# EAGLE board 64ch_hirose_flex (EAGLE 7.3.0)
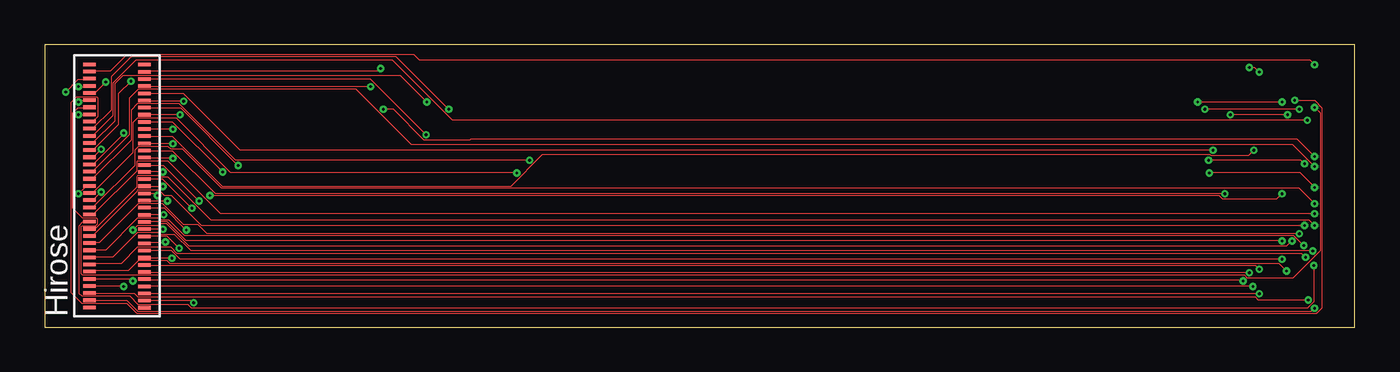
[diagram p0: board, top side]
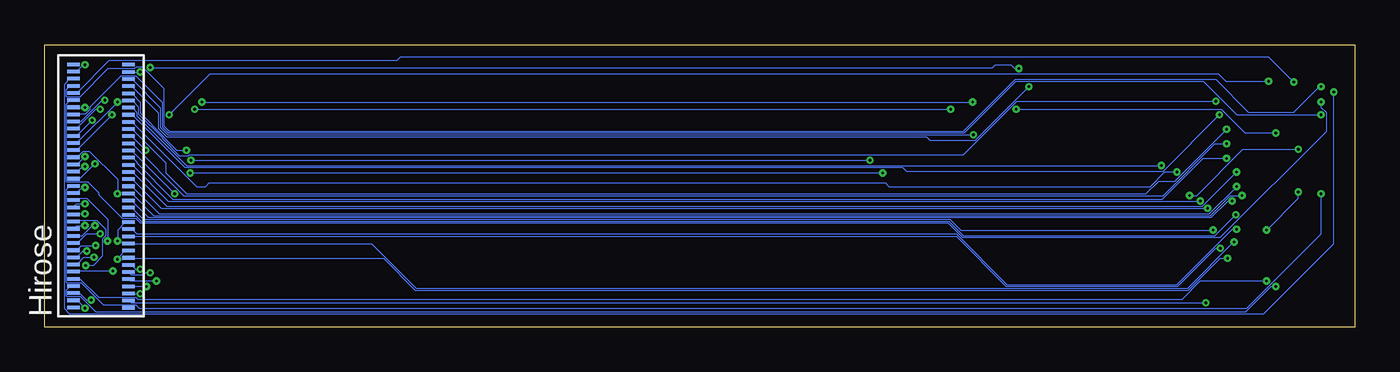
[diagram p1: board, bottom side, seen from below]

Size 73.33 x 15.8 mm. Coordinates in mm from the lower left corner, seen from the top.
Outline: 19.7,0 0,0 0,15.8 73.33,15.8 73.33,0 19.73,0
Copper layers (1*16): Top 0.035mm / dielectric 1.5mm / Bottom 0.035mm
Design rules "RHD64ch_amp_designrules": minimum track width 2mil, minimum drill 6mil, track to track 2mil, track to pad 2mil, pad to pad 2mil, via to via 2mil, smd to smd 2mil, copper to edge 20mil, drill to drill 15mil, minimum pad ring 5mil, minimum via ring 5mil, stop-mask expansion 2mil, vias tented up to drill 0mil, thermal gap 10mil

## Footprints (pad centres in the part's own frame; a part is rotated, then mirrored left to right if it is on the bottom)
HIROSE_DF40C-70DS = smd 0.2 x 0.7: P$1 0,0; P$2 -0.4,0; P$3 -0.8,0; P$4 -1.2,0; P$5 -1.6,0; P$6 -2,0; P$7 -2.4,0; P$8 -2.8,0; P$9 -3.2,0; P$10 -3.6,0; P$11 -4,0; P$12 -4.4,0; P$13 -4.8,0; P$14 -5.2,0; P$15 -5.6,0; P$16 -6,0; P$17 -6.4,0; P$18 -6.8,0; P$19 -7.2,0; P$20 -7.6,0; P$21 -8,0; P$22 -8.4,0; P$23 -8.8,0; P$24 -9.2,0; P$25 -9.6,0; P$26 -10,0; P$27 -10.4,0; P$28 -10.8,0; P$29 -11.2,0; P$30 -11.6,0; P$31 -12,0; P$32 -12.4,0; P$33 -12.8,0; P$34 -13.2,0; P$35 -13.6,0; P$36 0,-3.08; P$37 -0.42,-3.08; P$38 -0.82,-3.08; P$39 -1.22,-3.08; P$40 -1.62,-3.08; P$41 -2.02,-3.08; P$42 -2.42,-3.08; P$43 -2.82,-3.08; P$44 -3.22,-3.08; P$45 -3.62,-3.08; P$46 -4.02,-3.08; P$47 -4.42,-3.08; P$48 -4.82,-3.08; P$49 -5.22,-3.08; P$50 -5.62,-3.08; P$51 -6.02,-3.08; P$52 -6.42,-3.08; P$53 -6.82,-3.08; P$54 -7.22,-3.08; P$55 -7.62,-3.08; P$56 -8.02,-3.08; P$57 -8.42,-3.08; P$58 -8.82,-3.08; P$59 -9.22,-3.08; P$60 -9.62,-3.08; P$61 -10.02,-3.08; P$62 -10.42,-3.08; P$63 -10.82,-3.08; P$64 -11.22,-3.08; P$65 -11.62,-3.08; P$66 -12.02,-3.08; P$67 -12.42,-3.08; P$68 -12.82,-3.08; P$69 -13.22,-3.08; P$70 -13.62,-3.08

## Placement (x,y rotation side)
U$1  HIROSE_DF40_70PIN  [HIROSE_DF40C-70DS]  71.71,14.7 90 bottom
U$2  HIROSE_DF40_70PIN  [HIROSE_DF40C-70DS]  2.51,14.7 90 top

## Library data of the parts
U$1 U$2 = GG_hirose70

## Nets
B0: U$1.P$34 U$2.P$34
B1: U$1.P$33 U$2.P$33
B2: U$1.P$32 U$2.P$32
B3: U$1.P$31 U$2.P$31
B4: U$1.P$30 U$2.P$30
B5: U$1.P$29 U$2.P$29
B6: U$1.P$28 U$2.P$28
B7: U$1.P$27 U$2.P$27
B8: U$1.P$26 U$2.P$26
B9: U$1.P$25 U$2.P$25
B10: U$1.P$24 U$2.P$24
B11: U$1.P$23 U$2.P$23
B12: U$1.P$22 U$2.P$22
B13: U$1.P$21 U$2.P$21
B14: U$1.P$20 U$2.P$20
B15: U$1.P$19 U$2.P$19
B16: U$1.P$18 U$2.P$18
B17: U$1.P$17 U$2.P$17
B18: U$1.P$16 U$2.P$16
B19: U$1.P$15 U$2.P$15
B20: U$1.P$14 U$2.P$14
B21: U$1.P$13 U$2.P$13
B22: U$1.P$12 U$2.P$12
B23: U$1.P$11 U$2.P$11
B24: U$1.P$10 U$2.P$10
B25: U$1.P$9 U$2.P$9
B26: U$1.P$8 U$2.P$8
B27: U$1.P$7 U$2.P$7
B28: U$1.P$6 U$2.P$6
B29: U$1.P$5 U$2.P$5
B30: U$1.P$4 U$2.P$4
B31: U$1.P$3 U$2.P$3
B32: U$1.P$2 U$2.P$2
C0: U$1.P$69 U$2.P$69
C1: U$1.P$68 U$2.P$68
C2: U$1.P$67 U$2.P$67
C3: U$1.P$66 U$2.P$66
C4: U$1.P$65 U$2.P$65
C5: U$1.P$64 U$2.P$64
C6: U$1.P$63 U$2.P$63
C7: U$1.P$62 U$2.P$62
C8: U$1.P$61 U$2.P$61
C9: U$1.P$60 U$2.P$60
C10: U$1.P$59 U$2.P$59
C11: U$1.P$58 U$2.P$58
C12: U$1.P$57 U$2.P$57
C13: U$1.P$56 U$2.P$56
C14: U$1.P$55 U$2.P$55
C15: U$1.P$54 U$2.P$54
C16: U$1.P$53 U$2.P$53
C17: U$1.P$52 U$2.P$52
C18: U$1.P$51 U$2.P$51
C19: U$1.P$50 U$2.P$50
C20: U$1.P$49 U$2.P$49
C21: U$1.P$48 U$2.P$48
C22: U$1.P$47 U$2.P$47
C23: U$1.P$46 U$2.P$46
C24: U$1.P$45 U$2.P$45
C25: U$1.P$44 U$2.P$44
C26: U$1.P$43 U$2.P$43
C27: U$1.P$42 U$2.P$42
C28: U$1.P$41 U$2.P$41
C29: U$1.P$40 U$2.P$40
C30: U$1.P$39 U$2.P$39
C31: U$1.P$38 U$2.P$38
C32: U$1.P$37 U$2.P$37

## Tracks (layer width: path | path; a pad name or v marks a point on that pad's centre or on a via)
B0  (via drill 0.15)
  Top 0.051: v71.08,1.06 70.88,0.85 5.24,0.85 4.63,1.46 2.55,1.46 U$2.P$34
  Bottom 0.051: v71.08,1.06 71.48,1.46 71.69,1.46 U$1.P$34
B1  (via drill 0.15)
  Top 0.051: v70.72,1.52 67.93,1.52 67.78,1.67 5.24,1.67 5.04,1.87 2.55,1.87 U$2.P$33
  Bottom 0.051: v70.72,1.52 70.98,1.52 71.33,1.87 71.69,1.87 U$1.P$33
B2  (via drill 0.15)
  Top 0.051: v4.43,2.28 2.55,2.28 U$2.P$32
  Bottom 0.051: v4.43,2.28 4.68,2.28 6.1,0.85 70.47,0.85 71.33,1.72 72.09,1.72 72.14,1.77 72.14,2.02 71.89,2.28 71.74,2.28 U$1.P$32
B3  (via drill 0.15)
  Top 0.051: v4.94,2.58 4.83,2.68 2.55,2.68 U$2.P$31
  Bottom 0.051: v4.94,2.58 8.64,2.58 9.66,1.57 68.13,1.57 68.23,1.67 70.32,1.67 71.33,2.68 71.69,2.68 U$1.P$31
B4  (via drill 0.15)
  Top 0.051: v69.5,3.14 69.1,3.55 7.02,3.55 6.87,3.7 5.24,3.7 4.68,3.14 2.55,3.14 U$2.P$30
  Bottom 0.051: v69.5,3.14 71.69,3.14 U$1.P$30
B5  (via drill 0.15)
  Top 0.051: v70.57,3.9 70.37,4.11 7.43,4.11 7.07,4.46 5.19,4.46 4.28,3.55 2.55,3.55 U$2.P$29
  Bottom 0.051: v70.57,3.9 71.13,3.9 71.48,3.55 71.69,3.55 U$1.P$29
B6  (via drill 0.15)
  Top 0.051: v70.98,4.26 8.19,4.26 7.27,5.17 6.51,5.17 6.41,5.27 5.19,5.27 3.82,3.9 2.55,3.9 U$2.P$28
  Bottom 0.051: v70.98,4.26 71.18,4.26 71.54,3.9 71.69,3.9 U$1.P$28
B7  (via drill 0.15)
  Top 0.051: v70.47,4.56 69.91,5.12 7.83,5.12 6.97,5.98 6.56,5.98 6.46,6.09 5.19,6.09 3.41,4.31 2.55,4.31 U$2.P$27
  Bottom 0.051: v70.47,4.56 71.28,4.56 71.54,4.31 71.69,4.31 U$1.P$27
B8  (via drill 0.15)
  Top 0.051: v70.21,5.22 9.1,5.22 8.59,5.73 7.78,5.73 6.61,6.9 5.24,6.9 3.06,4.71 2.55,4.71 U$2.P$26
  Bottom 0.051: v70.21,5.22 70.98,5.22 71.48,4.71 71.69,4.71 U$1.P$26
B9  (via drill 0.15)
  Top 0.051: v70.52,5.68 8.8,5.68 7.12,7.36 6.72,7.36 6.41,7.66 5.19,7.66 5.14,7.61 5.14,7.56 2.7,5.12 2.55,5.12 U$2.P$25
  Bottom 0.051: v70.52,5.68 70.67,5.68 71.23,5.12 71.69,5.12 U$1.P$25
B10  (via drill 0.15)
  Top 0.051: v71.08,5.68 70.77,5.98 9.31,5.98 6.92,8.37 6.51,8.37 6.41,8.47 5.19,8.47 5.14,8.42 5.14,7.81 2.85,5.53 2.55,5.53 U$2.P$24
  Bottom 0.051: v71.08,5.68 71.54,5.68 71.69,5.53 U$1.P$24
B11  (via drill 0.15)
  Top 0.051: v71.03,3.45 71.03,1.41 70.67,1.06 8.24,1.06 8.04,1.26 5.24,1.26 4.78,1.72 2.09,1.72 1.94,1.87 1.94,5.68 2.14,5.88 2.5,5.88 U$2.P$23
  Bottom 0.051: v71.03,3.45 70.62,3.45 70.11,3.95 70.11,4.92 69.91,5.12 69.91,5.48 70.42,5.98 71.64,5.98 71.69,5.93 U$1.P$23
B12  (via drill 0.15)
  Top 0.051: v71.08,6.34 9.86,6.34 6.92,9.29 5.19,9.29 5.14,9.24 5.14,8.73 2.75,6.34 2.55,6.34 U$2.P$22
  Bottom 0.051: v71.08,6.34 71.69,6.34 U$1.P$22
B13  (via drill 0.15)
  Top 0.051: v71.08,6.9 70.21,7.76 9.91,7.76 7.73,9.95 7.07,9.95 6.92,10.1 5.24,10.1 5.04,9.9 5.04,9.03 2.75,6.75 2.55,6.75 U$2.P$21
  Bottom 0.051: v71.08,6.9 71.54,6.9 71.69,6.75 U$1.P$21
B14  (via drill 0.15)
  Top 0.051: v3.16,7.56 2.7,7.1 2.55,7.1 U$2.P$20 | v4.94,5.43 5.19,5.68 6.41,5.68 6.51,5.78 6.82,5.78 8.09,4.51 69.5,4.51 v69.81,4.82
  Bottom 0.051: v3.16,7.56 3.16,7.2 v4.94,5.43 | v69.81,4.82 69.81,6.04 70.98,7.2 71.59,7.2 71.69,7.1 U$1.P$20
B15  (via drill 0.15)
  Top 0.051: v26.43,8.63 10.42,8.63 7.37,11.67 5.19,11.67 4.94,11.42 4.94,9.74 2.7,7.51 2.55,7.51 U$2.P$19 | v65.19,8.63 70.27,8.63 v71.08,7.81
  Bottom 0.051: v65.19,8.63 v26.43,8.63 | v71.08,7.81 71.23,7.81 71.54,7.51 71.69,7.51 U$1.P$19
B16  (via drill 0.15)
  Top 0.051: v1.89,7.46 2.3,7.86 2.5,7.86 U$2.P$18
  Bottom 0.051: v1.89,7.46 1.89,5.22 6.05,1.06 68.03,1.06 68.23,1.26 70.06,1.26 71.28,2.48 72.09,2.48 72.14,2.53 72.14,7.66 71.94,7.86 71.74,7.86 U$1.P$18
B17  (via drill 0.15)
  Top 0.051: v27.14,9.34 10.68,9.34 7.53,12.49 5.19,12.49 4.83,12.13 4.83,10.46 2.7,8.32 2.55,8.32 U$2.P$17 | v65.13,9.34 70.32,9.34 v70.52,9.13
  Bottom 0.051: v65.13,9.34 v27.14,9.34 | v70.52,9.13 71.33,8.32 71.69,8.32 U$1.P$17
B18  (via drill 0.15)
  Top 0.051: v71.08,8.98 69.86,10.2 20.53,10.2 17.43,13.3 5.24,13.3 4.73,12.79 4.73,10.76 2.7,8.73 2.55,8.73 U$2.P$16
  Bottom 0.051: v71.08,8.98 71.23,8.98 71.48,8.73 71.69,8.73 U$1.P$16
B19  (via drill 0.15)
  Top 0.051: v4.43,10.86 4.43,10.81 2.75,9.13 2.55,9.13 U$2.P$15 | v18.96,12.18 19.52,12.18 21.24,10.46 23.78,10.46 23.83,10.51 70.11,10.51 v71.08,9.54
  Bottom 0.051: v4.43,10.86 6.16,10.86 7.48,12.18 v18.96,12.18 | v71.08,9.54 71.48,9.13 71.69,9.13 U$1.P$15
B20  (via drill 0.15)
  Top 0.051: v3.16,9.95 2.75,9.54 2.55,9.54 U$2.P$14 | v9.25,7.36 65.74,7.36 65.95,7.15 68.94,7.15 v69.25,7.46
  Bottom 0.051: v3.16,9.95 6.26,9.95 8.85,7.36 v9.25,7.36 | v69.25,7.46 69.25,8.27 70.82,9.85 71.18,9.85 71.48,9.54 71.69,9.54 U$1.P$14
B21  (via drill 0.15)
  Top 0.051: v4.83,13.76 4.12,13.05 4.12,11.32 2.75,9.95 2.55,9.95 U$2.P$13 | v69.55,11.88 v66.35,11.88
  Bottom 0.051: v4.83,13.76 7.22,13.76 7.63,14.16 64.07,14.16 v66.35,11.88 | v69.55,11.88 71.48,9.95 71.69,9.95 U$1.P$13
B22  (via drill 0.15)
  Top 0.051: v21.4,12.59 19.92,14.06 4.38,14.06 3.92,13.6 3.92,11.52 2.7,10.3 2.55,10.3 U$2.P$12 | v69.25,12.59 v64.52,12.59
  Bottom 0.051: v64.52,12.59 v21.4,12.59 | v69.25,12.59 71.54,10.3 71.69,10.3 U$1.P$12
B23  (via drill 0.15)
  Top 0.051: v70.67,11.57 22.82,11.57 19.47,14.93 5.09,14.93 3.82,13.66 3.82,11.83 2.7,10.71 2.55,10.71 U$2.P$11
  Bottom 0.051: v70.67,11.57 71.54,10.71 71.69,10.71 U$1.P$11
B24  (via drill 0.15)
  Top 0.051: v22.62,12.18 19.67,15.13 4.83,15.13 3.72,14.01 3.72,12.13 2.7,11.12 2.55,11.12 U$2.P$10 | v70.21,12.18 v64.93,12.18
  Bottom 0.051: v64.93,12.18 v22.62,12.18 | v70.21,12.18 70.47,12.18 71.54,11.12 71.69,11.12 U$1.P$10
B25  (via drill 0.15)
  Top 0.051: v69.96,12.69 71.08,12.69 71.48,12.28 71.48,1.06 71.18,0.75 5.19,0.75 4.63,1.31 2.09,1.31 1.48,1.92 1.48,12.59 1.79,12.89 2.91,12.89 2.96,12.84 2.96,11.78 2.7,11.52 2.55,11.52 U$2.P$9
  Bottom 0.051: v69.96,12.69 70.11,12.69 71.28,11.52 71.69,11.52 U$1.P$9
B26  (via drill 0.15)
  Top 0.051: v1.89,11.88 2.5,11.88 U$2.P$8
  Bottom 0.051: v1.89,11.88 6.61,11.88 8.49,13.76 18.96,13.76 21.85,10.86 66.4,10.86 66.76,11.22 66.76,12.59 68.23,14.06 69.05,14.06 70.77,12.33 70.77,12.18 71.03,11.93 71.69,11.93 U$1.P$8
B27  (via drill 0.15)
  Top 0.051: v71.08,12.28 71.38,11.98 71.38,4.26 69.86,2.73 67.32,2.73 67.17,2.89 2.14,2.89 2.04,2.99 2.04,5.63 2.09,5.68 2.85,5.68 2.96,5.78 2.96,6.04 2.91,6.09 2.14,6.09 1.58,6.65 1.58,11.98 1.89,12.28 2.5,12.28 U$2.P$7
  Bottom 0.051: v71.08,12.28 71.69,12.28 U$1.P$7
B28  (via drill 0.15)
  Top 0.051: v1.89,12.59 1.99,12.69 2.5,12.69 U$2.P$6
  Bottom 0.051: v1.89,12.59 1.89,12.28 1.58,11.98 1.58,10.96 7.53,5.02 21.96,5.02 22.77,5.83 67.98,5.83 68.23,6.09 69,6.09 70.32,7.41 70.32,7.51 70.93,8.12 72.09,8.12 72.14,8.17 72.14,12.44 71.89,12.69 71.74,12.69 U$1.P$6
B29  (via drill 0.15)
  Top 0.051: v3.41,13.71 2.85,13.15 2.55,13.15 U$2.P$5
  Bottom 0.051: v3.41,13.71 4.83,15.13 53.4,15.13 53.6,14.93 69.71,14.93 71.48,13.15 71.69,13.15 U$1.P$5
B30  (via drill 0.15)
  Top 0.051: v1.89,13.45 2.5,13.45 U$2.P$4
  Bottom 0.051: v1.89,13.45 1.99,13.45 3.41,12.03 5.95,12.03 7.78,13.86 19.01,13.86 21.9,10.96 66.35,10.96 66.66,11.27 66.66,13.35 67.88,14.57 68.18,14.57 68.28,14.47 69.76,14.47 71.33,12.89 72.09,12.89 72.14,12.95 72.14,13.25 71.94,13.45 71.74,13.45 U$1.P$4
B31  (via drill 0.15)
  Top 0.051: v1.18,13.15 1.89,13.86 2.5,13.86 U$2.P$3
  Bottom 0.051: v1.18,13.15 1.18,4.66 5.09,0.75 71.94,0.75 72.25,1.06 72.25,13.55 71.94,13.86 71.74,13.86 U$1.P$3
B32  (via drill 0.15)
  Top 0.051: v71.08,14.67 70.82,14.93 20.99,14.93 20.69,15.23 4.58,15.23 3.67,14.32 2.55,14.32 U$2.P$2
  Bottom 0.051: v71.08,14.67 71.18,14.67 71.54,14.32 71.69,14.32 U$1.P$2
C0  (via drill 0.15)
  Top 0.051: v8.34,1.36 8.24,1.46 5.6,1.46 U$2.P$69
  Bottom 0.051: v8.34,1.36 68.49,1.36 68.59,1.46 U$1.P$69
C1  (via drill 0.15)
  Top 0.051: v67.98,1.87 U$2.P$68
  Bottom 0.051: v67.98,1.87 68.59,1.87 U$1.P$68
C2  (via drill 0.15)
  Top 0.051: v67.62,2.28 U$2.P$67
  Bottom 0.051: v67.62,2.28 68.59,2.28 U$1.P$67
C3  (via drill 0.15)
  Top 0.051: v67.06,2.58 67.01,2.63 5.6,2.63 U$2.P$66
  Bottom 0.051: v67.06,2.58 68.54,2.58 68.59,2.63 U$1.P$66
C4  (via drill 0.15)
  Top 0.051: v67.42,3.04 5.6,3.04 U$2.P$65
  Bottom 0.051: v67.42,3.04 67.78,3.04 67.88,2.94 68.49,2.94 68.59,3.04 U$1.P$65
C5  (via drill 0.15)
  Top 0.051: v67.98,3.24 67.78,3.45 5.6,3.45 U$2.P$64
  Bottom 0.051: v67.98,3.24 68.23,3.24 68.44,3.45 68.59,3.45 U$1.P$64
C6  (via drill 0.15)
  Top 0.051: v7.12,3.85 5.6,3.85 U$2.P$63
  Bottom 0.051: v7.12,3.85 7.53,3.85 9.31,2.07 52.59,2.07 54.37,3.85 68.59,3.85 U$1.P$63
C7  (via drill 0.15)
  Top 0.051: v69.25,3.8 7.58,3.8 7.12,4.26 5.6,4.26 U$2.P$62
  Bottom 0.051: v69.25,3.8 69.1,3.95 69.1,4 68.84,4.26 68.64,4.26 U$1.P$62
C8  (via drill 0.15)
  Top 0.051: v6.77,4.77 6.72,4.71 5.6,4.71 U$2.P$61
  Bottom 0.051: v6.77,4.77 9.36,2.17 52.54,2.17 55.03,4.66 68.59,4.66 U$1.P$61
C9  (via drill 0.15)
  Top 0.051: v7.53,4.41 6.87,5.07 U$2.P$60
  Bottom 0.051: v7.53,4.41 7.78,4.41 9.91,2.28 19.52,2.28 22.31,5.07 68.59,5.07 U$1.P$60
C10  (via drill 0.15)
  Top 0.051: v6.61,5.48 U$2.P$59
  Bottom 0.051: v6.61,5.48 6.87,5.48 9.97,2.38 19.47,2.38 22.31,5.22 68.18,5.22 68.44,5.48 68.59,5.48 U$1.P$59
C11  (via drill 0.15)
  Top 0.051: v69.25,4.82 7.93,4.82 6.87,5.88 U$2.P$58
  Bottom 0.051: v69.25,4.82 69.25,5.43 68.84,5.83 68.64,5.83 U$1.P$58
C12  (via drill 0.15)
  Top 0.051: v6.66,6.29 U$2.P$57
  Bottom 0.051: v6.66,6.29 7.83,5.12 21.9,5.12 22.72,5.93 67.93,5.93 68.23,6.24 68.59,6.24 U$1.P$57
C13  (via drill 0.15)
  Top 0.051: v7.93,5.43 6.72,6.65 5.6,6.65 U$2.P$56
  Bottom 0.051: v7.93,5.43 22.06,5.43 22.67,6.04 67.83,6.04 68.44,6.65 68.59,6.65 U$1.P$56
C14  (via drill 0.15)
  Top 0.051: v6.87,7.05 5.6,7.05 U$2.P$55
  Bottom 0.051: v6.87,7.05 7.12,7.05 8.04,6.14 67.52,6.14 68.44,7.05 68.59,7.05 U$1.P$55
C15  (via drill 0.15)
  Top 0.051: v6.31,7.36 6.21,7.46 5.6,7.46 U$2.P$54
  Bottom 0.051: v6.31,7.36 6.97,7.36 8.09,6.24 67.22,6.24 68.44,7.46 68.59,7.46 U$1.P$54
C16  (via drill 0.15)
  Top 0.051: v6.61,7.86 5.6,7.86 U$2.P$53
  Bottom 0.051: v6.61,7.86 8.14,6.34 66.91,6.34 68.44,7.86 68.59,7.86 U$1.P$53
C17  (via drill 0.15)
  Top 0.051: v8.24,6.65 6.61,8.27 U$2.P$52
  Bottom 0.051: v8.24,6.65 66.81,6.65 68.44,8.27 68.59,8.27 U$1.P$52
C18  (via drill 0.15)
  Top 0.051: v6.61,8.68 U$2.P$51
  Bottom 0.051: v6.61,8.68 8.54,6.75 66.51,6.75 68.44,8.68 68.59,8.68 U$1.P$51
C19  (via drill 0.15)
  Top 0.051: v8.64,7.05 6.66,9.03 5.6,9.03 U$2.P$50
  Bottom 0.051: v8.64,7.05 66.4,7.05 68.39,9.03 68.59,9.03 U$1.P$50
C20  (via drill 0.15)
  Top 0.051: v7.17,9.44 5.6,9.44 U$2.P$49
  Bottom 0.051: v7.17,9.44 8.49,9.44 10.78,7.15 66.15,7.15 68.18,9.19 68.18,9.24 68.39,9.44 68.59,9.44 U$1.P$49
C21  (via drill 0.15)
  Top 0.051: v66.05,7.46 9.56,7.46 7.17,9.85 5.6,9.85 U$2.P$48
  Bottom 0.051: v66.05,7.46 68.44,9.85 68.59,9.85 U$1.P$48
C22  (via drill 0.15)
  Top 0.051: v7.17,10.25 5.6,10.25 U$2.P$47
  Bottom 0.051: v7.17,10.25 7.83,10.25 10.73,7.36 65.54,7.36 68.44,10.25 68.59,10.25 U$1.P$47
C23  (via drill 0.15)
  Top 0.051: v67.67,9.9 67.37,9.59 65.29,9.59 65.24,9.64 27.85,9.64 26.07,7.86 9.97,7.86 7.17,10.66 5.6,10.66 U$2.P$46
  Bottom 0.051: v67.67,9.9 68.44,10.66 68.59,10.66 U$1.P$46
C24  (via drill 0.15)
  Top 0.051: v7.17,11.06 5.6,11.06 U$2.P$45
  Bottom 0.051: v7.17,11.06 10.07,8.17 10.98,8.17 11.69,7.46 65.39,7.46 66.56,8.63 66.56,9.19 68.44,11.06 68.59,11.06 U$1.P$45
C25  (via drill 0.15)
  Top 0.051: v9.97,8.68 7.17,11.47 U$2.P$44
  Bottom 0.051: v9.97,8.68 10.63,8.68 11.44,7.86 26.07,7.86 26.27,8.07 64.12,8.07 64.32,7.86 64.83,7.86 68.44,11.47 68.59,11.47 U$1.P$44
C26  (via drill 0.15)
  Top 0.051: v7.58,11.88 U$2.P$43
  Bottom 0.051: v7.58,11.88 10.73,8.73 25.1,8.73 25.31,8.93 65.49,8.93 68.44,11.88 68.59,11.88 U$1.P$43
C27  (via drill 0.15)
  Top 0.051: v10.83,9.03 7.63,12.23 5.6,12.23 U$2.P$42
  Bottom 0.051: v10.83,9.03 65.39,9.03 68.18,11.83 68.18,12.03 68.39,12.23 68.59,12.23 U$1.P$42
C28  (via drill 0.15)
  Top 0.051: v7.78,12.64 5.6,12.64 U$2.P$41
  Bottom 0.051: v7.78,12.64 18.91,12.64 21.9,9.64 65.24,9.64 65.29,9.59 65.79,9.59 66.76,10.56 66.76,10.61 68.08,11.93 68.08,12.33 68.39,12.64 68.59,12.64 U$1.P$41
C29  (via drill 0.15)
  Top 0.051: v65.39,9.9 10.93,9.9 7.78,13.05 5.6,13.05 U$2.P$40
  Bottom 0.051: v65.39,9.9 65.95,9.9 66.66,10.61 66.66,10.66 67.98,11.98 67.98,12.59 68.44,13.05 68.59,13.05 U$1.P$40
C30  (via drill 0.15)
  Top 0.051: v18.25,13.45 5.6,13.45 U$2.P$39
  Bottom 0.051: v18.25,13.45 21.24,10.46 23.78,10.46 23.99,10.66 66.51,10.66 66.96,11.12 66.96,11.98 68.44,13.45 68.59,13.45 U$1.P$39
C31  (via drill 0.15)
  Top 0.051: v21.35,10.76 18.25,13.86 5.6,13.86 U$2.P$38
  Bottom 0.051: v21.35,10.76 66.46,10.76 66.86,11.17 66.86,12.28 68.44,13.86 68.59,13.86 U$1.P$38
C32  (via drill 0.15)
  Top 0.051: v18.8,14.47 18.65,14.32 5.6,14.32 U$2.P$37 | v67.42,14.52 67.73,14.52 v67.98,14.27
  Bottom 0.051: v18.8,14.47 19.06,14.47 19.26,14.67 20.13,14.67 20.28,14.52 v67.42,14.52 | v67.98,14.27 68.59,14.27 U$1.P$37